# EAGLE board soraduino (EAGLE 6.2)
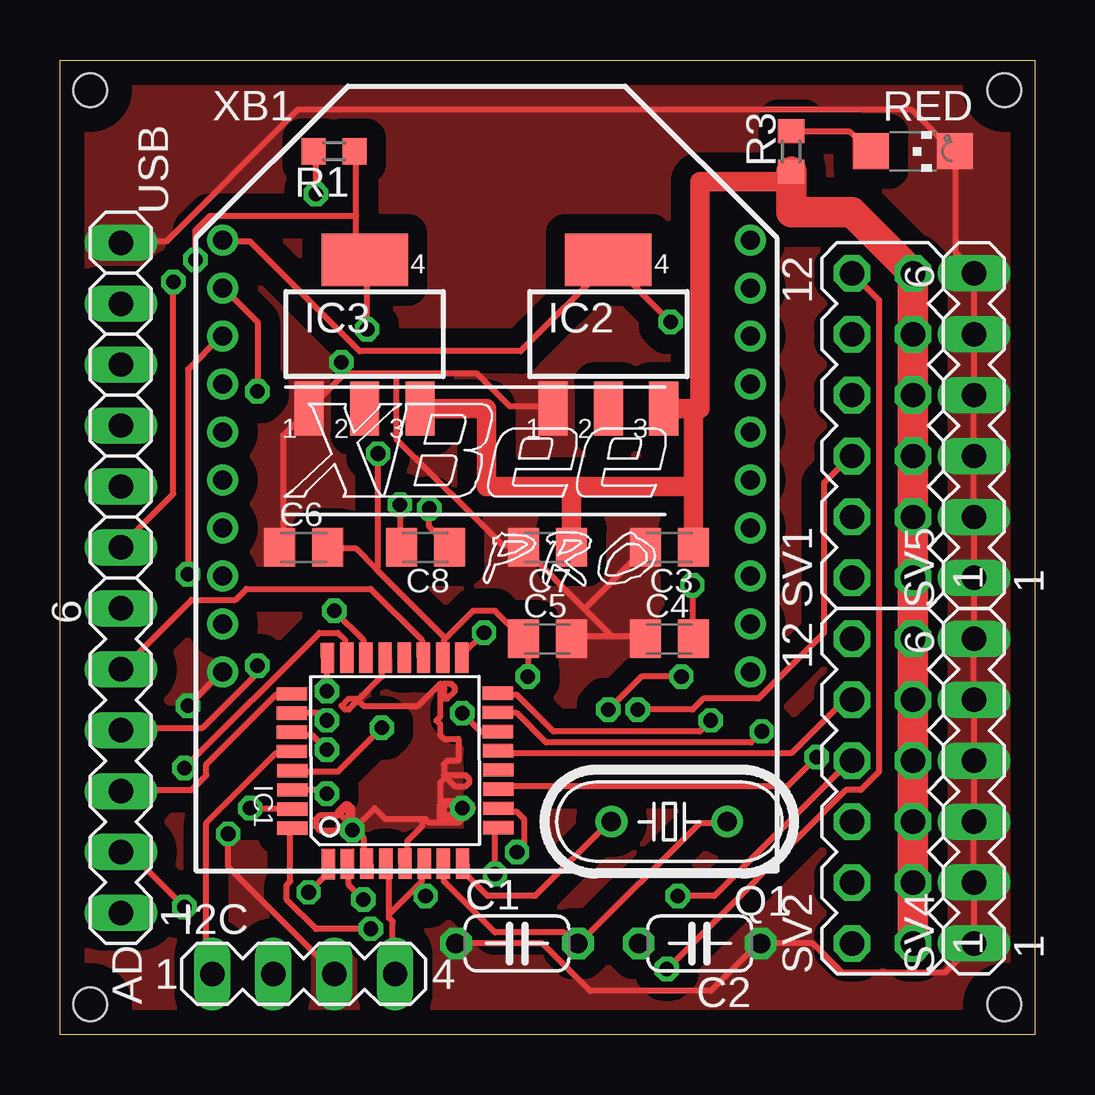
[diagram p0: board, top side]
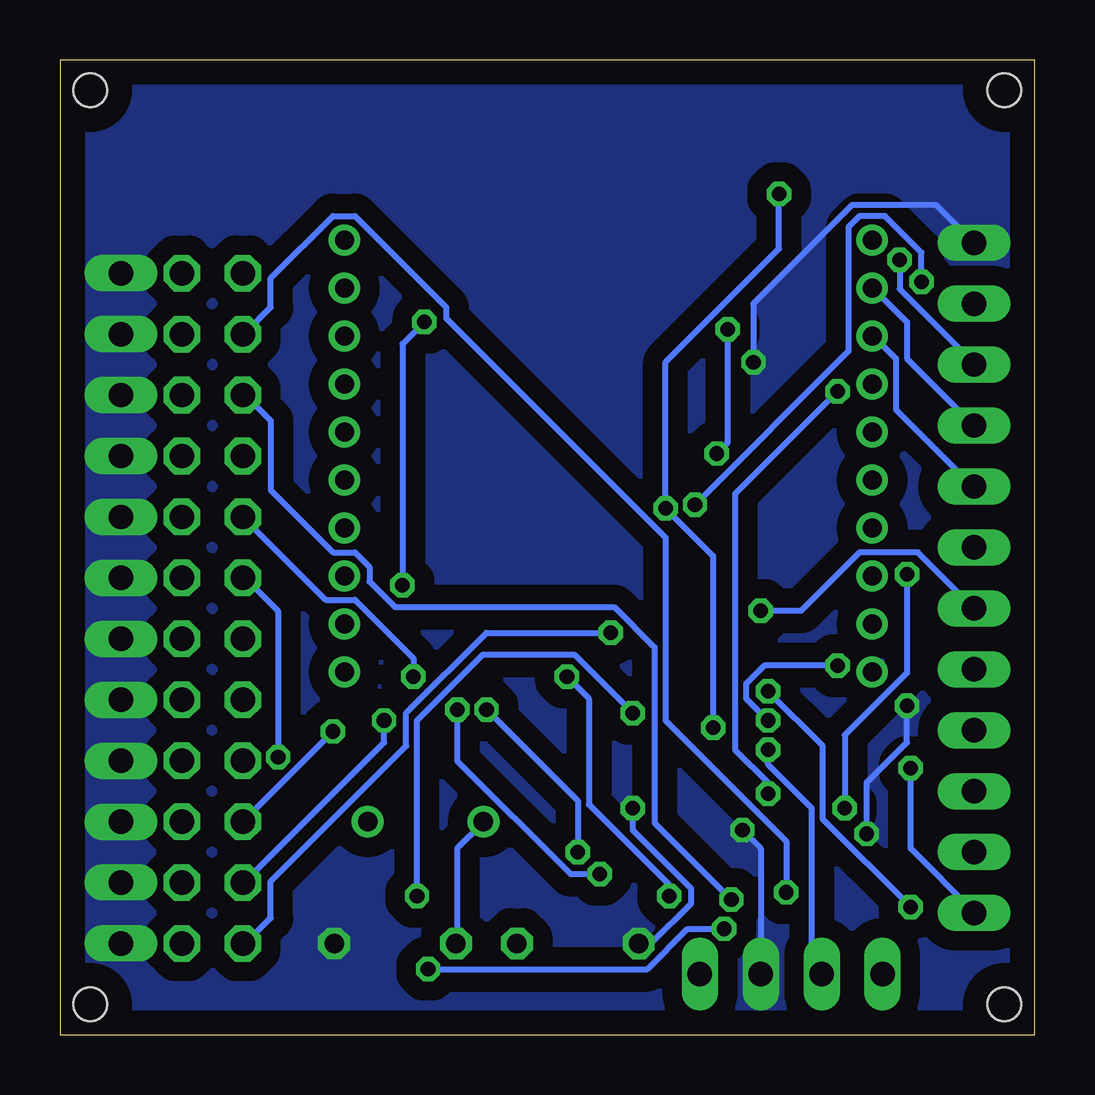
[diagram p1: board, bottom side, seen from below]

Size 40.64 x 40.64 mm. Coordinates in mm from the lower left corner, seen from the top.
Outline: 0,40.64 40.64,40.64 40.64,0 0,0 0,40.64
Copper layers (1*16): Top 0.035mm / dielectric 1.5mm / Bottom 0.035mm
Design rules: minimum track width 10mil, minimum drill 24mil, track to track 8mil, track to pad 8mil, pad to pad 8mil, via to via 8mil, smd to smd 8mil, copper to edge 40mil, drill to drill 8mil, minimum pad ring 10mil, minimum via ring 8mil, stop-mask expansion 4mil, vias tented up to drill 0mil, thermal gap 10mil
Holes 1.4 mm at 1.27,39.37 39.37,39.37 1.27,1.27 39.37,1.27

## Footprints (pad centres in the part's own frame; a part is rotated, then mirrored left to right if it is on the bottom)
MA06-1 = drill 1.016 long: 1 -6.35,0; 2 -3.81,0; 3 -1.27,0; 4 1.27,0; 5 3.81,0; 6 6.35,0
C050-024X044 = drill 0.813 octagon: 1 -2.54,0; 2 2.54,0
C0805K = smd 1.3 x 1.6: 1 -1,0; 2 1,0
MA04-1 = drill 1.016 long: 1 -3.81,0; 2 -1.27,0; 3 1.27,0; 4 3.81,0
TQFP32-08 = smd 1.27 x 0.559: 1 -4.293,2.8; 2 -4.293,2; 3 -4.293,1.2; 4 -4.293,0.4; 5 -4.293,-0.4; 6 -4.293,-1.2; 7 -4.293,-2; 8 -4.293,-2.8; 17 4.293,-2.8; 18 4.293,-2; 19 4.293,-1.2; 20 4.293,-0.4; 21 4.293,0.4; 22 4.293,1.2; 23 4.293,2; 24 4.293,2.8 | smd 0.559 x 1.27: 9 -2.8,-4.293; 10 -2,-4.293; 11 -1.2,-4.293; 12 -0.4,-4.293; 13 0.4,-4.293; 14 1.2,-4.293; 15 2,-4.293; 16 2.8,-4.293; 25 2.8,4.293; 26 2,4.293; 27 1.2,4.293; 28 0.4,4.293; 29 -0.4,4.293; 30 -1.2,4.293; 31 -2,4.293; 32 -2.8,4.293
SOT223 = smd 1.219 x 2.235: 1 -2.311,-3.099; 2 0,-3.099; 3 2.311,-3.099 | smd 3.6 x 2.2: 4 0,3.099
HC49/S = drill 0.813: 1 -2.413,0; 2 2.413,0
R0603 = smd 1 x 1.1: 1 -0.85,0; 2 0.85,0
CHIPLED_1206 = smd 1.5 x 1.5: A 0,-1.75; C 0,1.75
MA06-2 = drill 1.016 octagon: 1 -6.35,-1.27; 2 -6.35,1.27; 3 -3.81,-1.27; 4 -3.81,1.27; 5 -1.27,-1.27; 6 -1.27,1.27; 7 1.27,-1.27; 8 1.27,1.27; 9 3.81,-1.27; 10 3.81,1.27; 11 6.35,-1.27; 12 6.35,1.27
1X06 = drill 1.016 long: 1 -6.35,0; 2 -3.81,0; 3 -1.27,0; 4 1.27,0; 5 3.81,0; 6 6.35,0
XBEE-PRO = drill 0.8 pad 1.27: 1 -11,9; 2 -11,7; 3 -11,5; 4 -11,3; 5 -11,1; 6 -11,-1; 7 -11,-3; 8 -11,-5; 9 -11,-7; 10 -11,-9; 11 11,-9; 12 11,-7; 13 11,-5; 14 11,-3; 15 11,-1; 16 11,1; 17 11,3; 18 11,5; 19 11,7; 20 11,9

## Placement (x,y rotation side)
AD  AD  [MA06-1]  2.54,11.43 90 top
C1  22p  [C050-024X044]  19.05,3.81 0 top
C2  22p  [C050-024X044]  26.67,3.81 180 top
C3  0.1u  [C0805K]  25.4,20.32 180 top
C4  47u  [C0805K]  25.4,16.51 0 top
C5  0.1u  [C0805K]  20.32,16.51 0 top
C6  47u  [C0805K]  10.16,20.32 0 top
C7  0.1u  [C0805K]  20.32,20.32 180 top
C8  0.1u  [C0805K]  15.24,20.32 180 top
I2C  I2C  [MA04-1]  10.16,2.54 0 top
IC1  ATMEGA168-AU  [TQFP32-08]  13.97,11.43 90.2 top
IC2  317EMP  [SOT223]  22.86,29.21 0 top
IC3  317EMP  [SOT223]  12.7,29.21 0 top
Q1  QT  [HC49/S]  25.4,8.89 180 top
R1  1k  [R0603]  11.43,36.83 180 top
R3  1k  [R0603]  30.48,36.83 90 top
RED  [CHIPLED_1206]  35.56,36.83 270 top
SV1  Servo0  [MA06-2]  34.29,25.4 90 top
SV2  Servo1  [MA06-2]  34.29,10.16 90 top
SV4  GND  [MA06-1]  38.1,10.16 90 top
SV5  GND  [MA06-1]  38.1,25.4 90 top
USB  [1X06]  2.54,26.67 90 top
XB1  XBEE-PRO  [XBEE-PRO]  17.78,24.13 0 top

## Library data of the parts
AD I2C SV1 SV2 SV4 SV5 = con-lstb; OC_FARNELL: unknown; OC_NEWARK: unknown
C1 C2 R1 R3 = rcl
C3-C8 = resistor
IC1 = Arduino-AVR
IC2 IC3 = linear
Q1 = crystal; OC_FARNELL: 1667008; OC_NEWARK: unknown
RED = led
USB = pinhead
XB1 = maxstream; MPN: XBP24-AWI-001; OC_FARNELL: 1337916; OC_NEWARK: 42M2667

## Nets
GND: C1.1 C2.1 C3.2 C4.1 C5.2 C6.1 C7.2 I2C.3 IC1.3 IC1.5 IC1.21 IC2.1 IC3.1 RED.C SV4.1 SV4.2 SV4.3 SV4.4 SV4.5 SV4.6 SV5.1 SV5.2 SV5.3 SV5.4 SV5.5 SV5.6 USB.6 XB1.10
N$1: C8.2 USB.1
N$2: C8.1 IC1.29 R1.2
N$3: IC1.30 USB.3 XB1.2
N$4: C1.2 IC1.7 Q1.1
N$5: C2.2 IC1.8 Q1.2
N$6: C4.2 IC2.4 XB1.1
N$7: C5.1 C6.2 I2C.4 IC1.4 IC1.6 IC1.18 IC3.4 R1.1 USB.4
N$8: IC1.32 SV1.12
N$9: IC1.1 SV1.10
N$10: R3.2 RED.A
N$11: IC1.2 SV1.8
N$12: IC1.9 SV1.6
N$13: IC1.10 SV1.4
N$14: IC1.11 SV1.2
N$15: IC1.12
N$16: IC1.13 SV2.10
N$17: IC1.14 SV2.8
N$18: IC1.15 SV2.6
N$19: IC1.16 SV2.4
N$20: IC1.17 SV2.2
N$21: AD.6 IC1.22
N$22: AD.5 IC1.19
N$23: AD.4 IC1.26
N$24: AD.3 IC1.25
N$25: AD.2 IC1.24
N$26: AD.1 IC1.23
N$31: I2C.1 IC1.28
N$32: I2C.2 IC1.27
N$33: IC1.31 USB.2 XB1.3
VCC: C3.1 C7.1 IC2.3 IC3.3 R3.1 SV1.1 SV1.3 SV1.5 SV1.7 SV1.9 SV1.11 SV2.1 SV2.3 SV2.5 SV2.7 SV2.9 SV2.11

## Tracks (layer width: path | path; a pad name or v marks a point on that pad's centre or on a via)
GND  (via drill 0.61)
  Top 0.254: v5.33,13.72 6.71,15.09 XB1.10 | v7.01,8.38 7.01,7.01 11.43,2.59 I2C.3 | 12.27,8.61 11.58,9.3 11.89,9.6 12.04,9.6 12.19,9.45 12.19,8.84 11.89,8.53 10.82,8.53 10.67,8.69 10.67,8.99 10.82,9.14 11.58,9.14 11.89,9.45 12.04,9.45 12.04,8.99 11.89,8.84 11.89,8.69 12.04,8.53 v12.19,8.53 12.27,8.61 | 12.27,8.61 12.65,8.23 12.65,7.16 IC1.3 | 12.27,8.61 13.11,9.45 13.56,8.99 15.09,8.99 | 15.09,8.99 15.24,8.99 15.39,8.84 16.61,8.84 17.22,9.45 16.92,9.75 16,9.75 15.93,9.68 | 15.93,9.68 15.85,9.6 15.85,8.99 16.61,8.99 17.07,9.45 16.92,9.6 16,9.6 | 15.93,9.68 15.85,9.75 15.85,10.52 16.15,10.82 16.92,10.82 17.07,10.67 17.07,10.52 16.92,10.36 16.46,10.36 16,10.82 16,11.28 16.15,11.43 16.61,11.43 16.61,12.34 16,12.34 15.85,12.5 15.85,12.95 15.7,13.11 15.85,13.26 15.85,14.48 16,14.63 16.31,14.63 16.46,14.48 16.46,14.33 16.15,14.02 16,14.02 16,14.48 15.85,14.63 14.94,13.72 12.65,13.72 12.34,14.02 12.04,14.02 11.73,13.72 11.89,13.56 12.04,13.56 13.41,14.94 13.41,15.7 IC1.21 | 15.09,8.99 15.09,8.69 14.48,8.08 14.48,7.16 IC1.5 | C1.1 20.12,3.81 22.1,1.83 27.13,1.83 29.11,3.81 C2.1 31.39,3.81 32.61,2.59 36.88,2.59 SV4.1 SV4.2 SV4.3 SV4.4 SV4.5 SV4.6 SV5.1 SV5.2 SV5.3 SV5.4 SV5.5 SV5.6 38.1,31.85 37.34,32.61 37.34,36.73 RED.C 37.19,36.88 35.51,38.56 9.91,38.56 4.42,33.07 2.59,33.07 USB.6 | 16,9.6 16,9.14 16.46,9.14 v16.76,9.45 | 16,9.6 15.93,9.68 | 23.01,16.61 24.38,16.61 C4.1 | 23.01,16.61 21.34,16.61 C5.2 | 23.01,16.61 21.87,17.75 | 21.87,17.75 19.36,20.27 C7.2 19.2,20.42 18.44,20.42 14.02,24.84 14.02,27.58 | 21.87,17.75 24.38,20.27 C3.2 | C6.1 9.3,20.42 9.3,24.99 10.36,26.06 IC3.1 10.52,26.21 11.81,27.51
  Top 0.254: 14.02,27.58 11.89,27.58 11.81,27.51 | 14.02,27.58 17.37,27.58 18.75,26.21 20.42,26.21 IC2.1 | v11.73,28.04 11.73,27.58 11.81,27.51
  Bottom 0.254: v5.33,13.72 5.33,12.19 7.01,10.52 v7.01,8.38 | v16.76,9.45 16.76,8.53 14.33,6.1 14.33,5.49 16,3.81 C1.1 | I2C.3 11.43,7.77 v12.19,8.53 | v11.73,28.04 11.73,30.48 7.62,34.59 4.12,34.59 USB.6
  pour Top (isolate 0.813, no thermals): 0,40.64 40.64,40.64 40.64,0 0,0
  pour Bottom (isolate 0.813, no thermals): 0,40.64 40.64,40.64 40.64,0 0,0
N$1  (via drill 0.61)
  Top 0.254: v14.17,22.1 14.17,20.42 C8.2 | v4.72,31.39 4.72,22.55 2.59,20.42 USB.1
  Bottom 0.254: v14.17,22.1 7.77,28.5 7.77,33.68 7.32,34.14 6.25,34.14 4.72,32.61 v4.72,31.39
N$2  (via drill 0.61)
  Top 0.254: v10.67,35.05 10.67,36.73 R1.2 | v15.39,21.95 15.39,21.18 16.15,20.42 C8.1 | v13.41,12.8 11.58,10.97 9.75,10.97 IC1.29
  Bottom 0.254: v10.67,35.05 10.67,32.77 15.39,28.04 v15.39,21.95 13.41,19.96 v13.41,12.8
N$3  (via drill 0.61)
  Top 0.254: v11.12,10.06 10.97,10.21 9.75,10.21 IC1.30 | v8.23,26.82 8.23,29.72 6.86,31.09 XB1.2
  Bottom 0.254: v11.12,10.06 11.12,10.52 12.5,11.89 12.5,22.55 v8.23,26.82 | USB.3 5.33,28.19 5.33,29.72 6.71,31.09 XB1.2
N$4
  Top 0.254: IC1.7 16,7.01 16,6.4 18.14,4.27 21.03,4.27 21.49,3.81 C1.2 21.64,3.81 26.67,8.84 27.74,8.84 Q1.1
N$5
  Top 0.254: IC1.8 16.92,7.01 16.92,6.71 17.83,5.79 19.81,5.79 22.86,8.84 Q1.2
  Bottom 0.254: C2.2 24.08,3.81 24.08,7.77 23.01,8.84 Q1.2
N$6  (via drill 0.61)
  Top 0.254: v26.36,18.75 26.36,16.61 C4.2 | IC2.4 v25.45,29.72 | IC2.4 | XB1.1 6.86,33.07 7.92,33.07 12.5,28.5 19.2,28.5 22.86,32.16 IC2.4
  Bottom 0.254: v26.36,18.75 26.36,28.8 v25.45,29.72
N$7  (via drill 0.61)
  Top 0.254: 12.34,34.14 12.34,32.77 12.65,32.46 IC3.4 12.8,32.31 v12.8,29.41 | 12.34,34.14 12.34,36.73 R1.1 | v5.64,32.31 5.64,33.53 6.25,34.14 12.34,34.14 | 13.72,5.03 13.72,4.88 13.87,4.72 13.87,2.59 I2C.4 | 13.72,5.03 13.72,7.01 IC1.4 | 13.72,5.03 14.86,6.17 | 14.86,6.17 15.09,6.4 15.09,7.01 IC1.6 | 16.08,16.54 17.22,17.68 18.14,17.68 19.2,16.61 C5.1 19.36,16.46 19.51,16.31 v19.51,14.94 | 16.08,16.54 16,16.46 16,15.85 IC1.18 | 16.08,16.54 13.18,19.43 | 13.18,19.43 12.34,20.27 11.28,20.27 C6.2 | v15.24,5.79 14.86,6.17 | v13.26,24.23 13.26,19.51 13.18,19.43
  Bottom 0.254: v5.64,32.31 5.64,31.09 2.59,28.04 USB.4 | v15.24,5.79 15.24,6.25 18.59,9.6 18.59,14.02 v19.51,14.94 | v12.8,29.41 12.8,24.69 v13.26,24.23
N$8  (via drill 0.61)
  Top 0.254: v12.95,4.42 10.67,4.42 9.45,5.64 9.45,6.25 9.6,6.4 9.6,8.53 IC1.32 | v25.3,2.74 32.77,10.21 33.38,10.21 34.14,10.97 34.14,30.63 SV1.12
  Bottom 0.254: v12.95,4.42 14.48,4.42 16.15,2.74 v25.3,2.74
N$9  (via drill 0.61)
  Top 0.254: v10.36,5.94 11.12,6.71 11.12,7.01 IC1.1
  Bottom 0.254: v10.36,5.94 10.36,8.08 15.39,13.11 15.39,20.73 24.54,29.87 24.54,30.33 28.35,34.14 29.26,34.14 31.85,31.55 31.85,30.33 32.92,29.26 SV1.10
N$10
  Top 0.254: R3.2 30.48,37.64 32.92,37.64 33.68,36.88 RED.A
N$11  (via drill 0.61)
  Top 0.254: v12.65,5.64 12.04,6.25 12.04,7.01 IC1.2
  Bottom 0.254: v12.65,5.64 15.85,8.84 15.85,16.15 17.53,17.83 26.67,17.83 27.74,18.9 27.74,19.51 28.35,20.12 29.26,20.12 31.85,22.71 31.85,25.6 32.92,26.67 SV1.8
N$12  (via drill 0.61)
  Top 0.254: v18.14,6.71 18.14,8.53 IC1.9 | v24.08,13.56 26.36,13.56 26.82,14.02 29.11,14.02 31.85,16.76 31.85,23.01 32.92,24.08 SV1.6
  Bottom 0.254: v18.14,6.71 19.36,6.71 24.08,11.43 v24.08,13.56
N$13  (via drill 0.61)
  Top 0.254: v19.05,7.62 19.36,7.92 19.36,8.99 19.05,9.3 18.29,9.3 IC1.10 | v22.86,13.56 24.23,14.94 v25.91,14.94
  Bottom 0.254: v19.05,7.62 19.05,9.75 v22.86,13.56 | v25.91,14.94 25.91,15.7 28.35,18.14 29.57,18.14 SV1.4
N$14  (via drill 0.61)
  Top 0.254: v31.55,11.58 30.33,10.36 18.29,10.36 IC1.11
  Bottom 0.254: v31.55,11.58 31.55,17.68 32.92,19.05 SV1.2
N$16
  Top 0.254: IC1.13 18.29,11.73 30.48,11.73 32.61,13.87 32.92,13.87 SV2.10
N$17  (via drill 0.61)
  Top 0.254: v16.76,13.41 17.53,12.65 18.14,12.65 IC1.14 | v25.76,5.79 27.28,5.79 32.92,11.43 SV2.8
  Bottom 0.254: v16.76,13.41 19.2,15.85 23.01,15.85 25.76,13.11 v25.76,5.79
N$18  (via drill 0.61)
  Top 0.254: v29.26,12.65 28.8,12.19 20.27,12.19 19.05,13.41 18.29,13.41 IC1.15
  Bottom 0.254: SV2.6 v29.26,12.65
N$19  (via drill 0.61)
  Top 0.254: v27.13,13.11 26.67,12.65 20.57,12.65 19.05,14.17 18.29,14.17 IC1.16
  Bottom 0.254: v27.13,13.11 27.13,12.19 32.92,6.4 SV2.4
N$20  (via drill 0.61)
  Top 0.254: v17.68,16.76 16.76,15.85 IC1.17
  Bottom 0.254: v17.68,16.76 22.86,16.76 26.21,13.41 26.21,12.04 31.85,6.4 31.85,4.88 32.92,3.81 SV2.2
N$21  (via drill 0.61)
  Top 0.254: v11.43,17.68 12.65,16.46 12.65,15.85 IC1.22
  Bottom 0.254: v11.43,17.68 9.75,17.68 7.32,20.12 4.88,20.12 AD.6
N$22
  Top 0.254: IC1.19 15.09,15.85 15.09,16.46 12.95,18.59 7.77,18.59 7.32,18.14 5.49,18.14 2.59,15.24 AD.5
N$23  (via drill 0.61)
  Top 0.254: v11.12,13.11 10.82,13.41 9.75,13.41 IC1.26 | v8.23,15.39 8.23,15.09 5.94,12.8 2.59,12.8 AD.4
  Bottom 0.254: v11.12,13.11 12.04,14.02 12.04,14.63 11.28,15.39 v8.23,15.39
N$24
  Top 0.254: IC1.25 9.6,14.17 8.99,14.17 6.1,11.28 6.1,10.82 5.49,10.21 2.59,10.21 AD.3
N$25  (via drill 0.61)
  Top 0.254: v11.12,14.33 11.12,15.7 IC1.24 | v5.18,5.33 2.9,7.62 AD.2
  Bottom 0.254: v11.12,14.33 8.84,12.04 8.84,8.99 v5.18,5.33
N$26  (via drill 0.61)
  Top 0.254: v5.18,11.12 10.82,16.76 11.58,16.76 11.89,16.46 11.89,15.85 IC1.23
  Bottom 0.254: v5.18,11.12 5.18,7.77 2.59,5.18 AD.1
N$31
  Top 0.254: IC1.28 9.6,11.73 8.99,11.73 6.1,8.84 6.1,2.74 6.25,2.59 I2C.1
N$32  (via drill 0.61)
  Top 0.254: v11.12,11.89 10.52,12.5 9.75,12.5 IC1.27
  Bottom 0.254: v11.12,11.89 11.12,11.28 9.3,9.45 9.3,2.9 8.99,2.59 I2C.2
N$33  (via drill 0.61)
  Top 0.254: v7.92,9.45 9.6,9.45 IC1.31 | v5.33,19.2 5.33,27.74 6.71,29.11 XB1.3
  Bottom 0.254: v7.92,9.45 7.92,12.5 5.33,15.09 v5.33,19.2 | USB.2 2.59,22.86 5.79,26.06 5.79,28.19 6.71,29.11 XB1.3
VCC
  Top 0.813: IC2.3 26.4,26.11 | R3.1 30.48,35.56 26.67,35.56 26.67,26.11 26.4,26.11 | 26.4,26.11 26.4,22.86 | 26.4,22.86 C3.1 | IC3.3 17.78,26.11 17.78,22.86 21.32,22.86 | C7.1 21.32,22.86 | 21.32,22.86 26.4,22.86
  Top 1.27: SV2.1 SV2.3 SV2.5 SV2.7 SV2.9 SV2.11 SV1.1 SV1.3 SV1.5 SV1.7 SV1.9 SV1.11 33.02,34.29 30.48,34.29 R3.1